# EAGLE board btle_board_R0_1 (EAGLE 6.6.0)
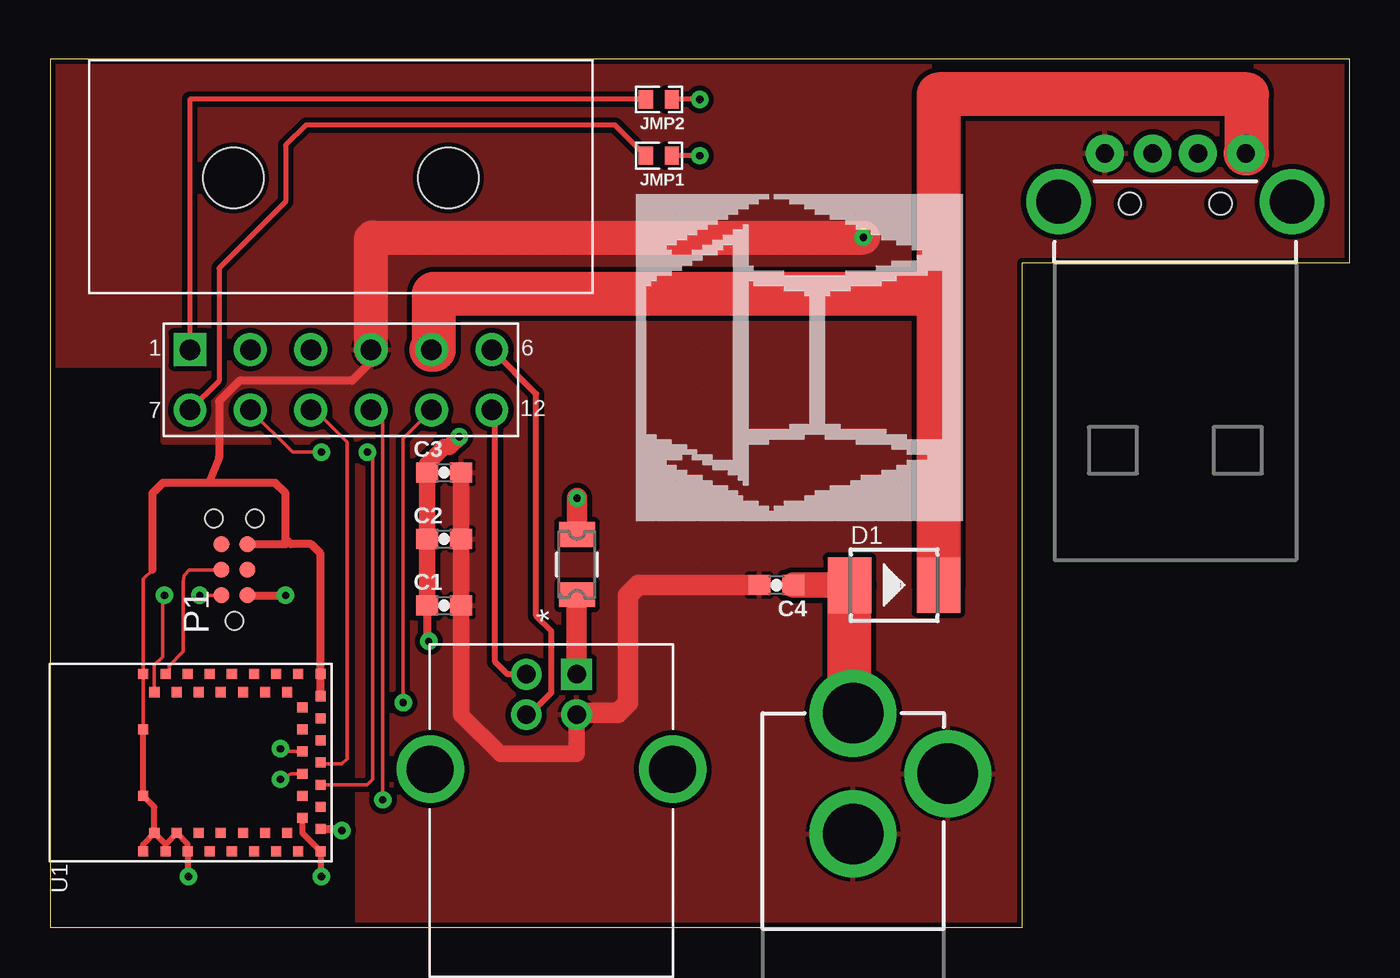
[diagram p0: board, top side]
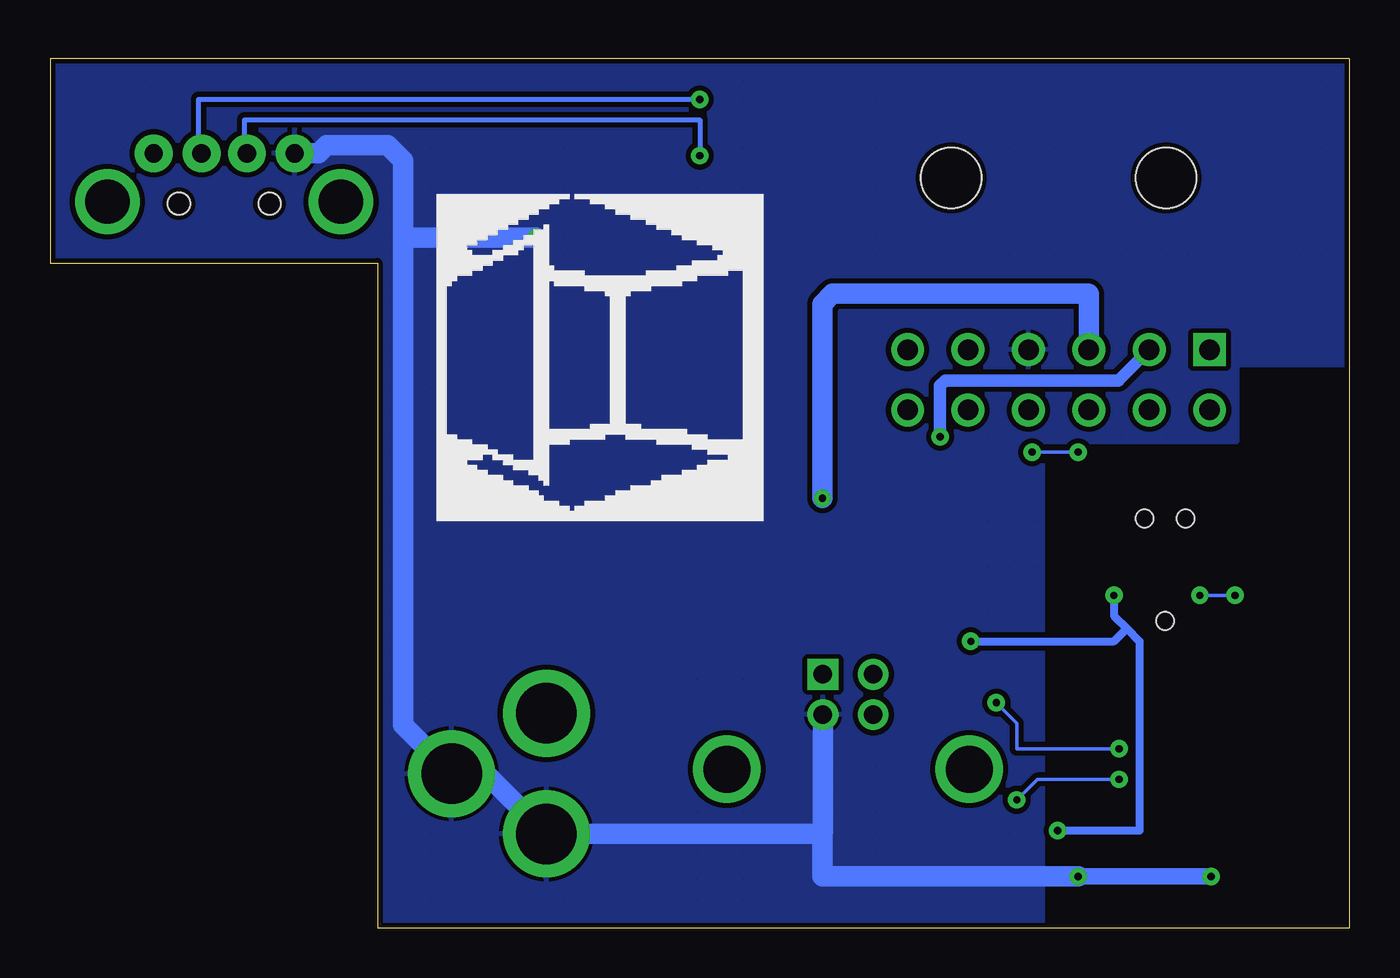
[diagram p1: board, bottom side, seen from below]

Size 64.52 x 43.18 mm. Coordinates in mm from the lower left corner, seen from the top.
Outline: 0,43.18 0,0 48.26,0 48.26,33.02 64.52,33.02 64.52,43.18 0,43.18
Copper layers (1*16): Top 0.035mm / dielectric 1.5mm / Bottom 0.035mm
Design rules "PatternAgents_7mil": minimum track width 7mil, minimum drill 14mil, track to track 7mil, track to pad 7mil, pad to pad 7mil, via to via 7mil, smd to smd 7mil, copper to edge 7mil, drill to drill 7mil, minimum pad ring 12mil, minimum via ring 10mil, stop-mask expansion 4mil, vias tented up to drill 25mil, thermal gap 7mil

## Footprints (pad centres in the part's own frame; a part is rotated, then mirrored left to right if it is on the bottom)
0603-CAP = smd 1.1 x 1: 1 -0.85,0; 2 0.85,0
DO-214AA = smd 2.159 x 2.743: + -2.21,0; - 2.21,0
1206LSERIES = smd 1.219 x 1.778: 1 -1.499,0; 2 1.499,0
JMP-2-NO-0402 = smd 0.7 x 0.9: 1 -0.65,0; 2 0.65,0
TC2030-MCP-NL = smd 0.787 x 0.787: 1 1.27,-0.635; 2 1.27,0.635; 3 2.54,-0.635; 4 2.54,0.635; 5 3.81,-0.635; 6 3.81,0.635 | hole 0.889: 0,0; 5.08,-1.016; 5.08,1.016
MOLEX_44428-1201 = drill 1.02 square: 1 7.5,5.065 | drill 1.02: 2 4.5,5.065; 3 1.5,5.065; 4 -1.5,5.065; 5 -4.5,5.065; 6 -7.5,5.065; 7 7.5,8.065; 8 4.5,8.065; 9 1.5,8.065; 10 -1.5,8.065; 11 -4.5,8.065; 12 -7.5,8.065 | hole 3: -5.34,-3.465; 5.34,-3.465
OST_USB-B1HSB6 = drill 0.92 square: 1 1.25,4.71 | drill 0.92: 2 -1.25,4.71; 3 -1.25,2.71; 4 1.25,2.71 | drill 2.33: P1 -6.02,0; P2 6.02,0
POWER_JACK_PTH = drill 2.997 pad 4.318: GND 0,7.7; GNDBREAK 4.7,10.7; PWR 0,13.7
USB-A-H = drill 0.914 pad 1.88: D+ 2.4,1.127; D- 2.4,-1.127; GND 2.4,3.5; VBUS 2.4,-3.5 | drill 2.2: GND2 0,-5.8; GND3 0,5.8 | hole 1.1: -0.1,2.25; -0.1,-2.25
BMD-300 = smd 0.5 x 0.5: P1 0.5,9.35; P2 1.4,8.8; P3 0.5,8.25; P4 1.4,7.7; P5 0.5,7.15; P6 1.4,6.6; P7 0.5,6.05; P8 1.4,5.5; P9 0.5,4.95; P10 1.4,4.4; P11 0.5,3.85; P12 1.4,3.3; P13 0.5,2.75; P14 1.4,2.2; P15 0.5,1.65; P16 0.5,0.55; P17 1.6,0.55; P18 2.15,1.45; P19 2.7,0.55; P20 3.25,1.45; P21 3.8,0.55; P22 4.35,1.45; P23 4.9,0.55; P24 5.45,1.45; P25 6,0.55; P26 6.55,1.45; P27 7.1,0.55; P28 7.65,1.45; P29 8.2,0.55; P30 9.3,0.55; P31 9.3,1.65; P32 8.4,2.2; P33 9.3,2.75; P34 8.4,3.3; P35 9.3,3.85; P36 8.4,4.4; P37 9.3,4.95; P38 8.4,5.5; P39 9.3,6.05; P40 8.4,6.6; P41 9.3,7.15; P42 8.4,7.7; P43 9.3,8.25; P44 8.4,8.8; P45 9.3,9.35; P46 6.55,9.35; P47 3.25,9.35

## Placement (x,y rotation side)
C1  0.1uF  [0603-CAP]  19.56,16 0 top
C2  10uF  [0603-CAP]  19.56,19.3 0 top
C3  10uF  [0603-CAP]  19.56,22.61 0 top
C4  10uF  [0603-CAP]  36.07,17.02 180 top
D1  28V-5A  [DO-214AA]  41.91,17.02 0 top
F1  1206L050YR  [1206LSERIES]  26.16,18.03 90 top
JMP1  [JMP-2-NO-0402]  30.23,38.35 180 top
JMP2  [JMP-2-NO-0402]  30.23,41.15 180 top
P1  [TC2030-MCP-NL]  9.14,15.24 90 top
P2  44428-1201  [MOLEX_44428-1201]  14.43,33.78 180 top
P3  USB-B1HSB6  [OST_USB-B1HSB6]  24.89,7.87 0 top
P4  POWER_JACKPTH  [POWER_JACK_PTH]  39.88,-3.05 0 top
P5  USB-A-H  [USB-A-H]  55.88,36.07 90 top
U1  [BMD-300]  13.97,3.3 90 top
U$4  [NSVR_LOGO]  45.21,20.32 0 bottom
U$100  [NSVR_LOGO]  29.21,20.32 0 top

## Library data of the parts
C1-C4 = PatternAgents-ProtoPads
D1 = Seeed-Diode-2016; MPN: SS54B
F1 = 1206L050; COPYRIGHT: Copyright C 2015 Accelerated Designs. All rights reserved; MANUFACTURER_PART_NUMBER: 1206L050YR; VENDOR: Littelfuse Inc
JMP1 JMP2 = PatternAgents-ProtoPads; BOM: EXCLUDE
P1 = tag-connect
P2 = 44428-1201; AVAILABILITY: Good; DESCRIPTION: Conn Wire to Board HDR 12 POS 3mm Solder RA Thru-Hole Micro-Fit 3.0 BMI? Tray; MF: Molex; MP: 44428-1201; PACKAGE: None; PRICE: 2.39 USD
P3 = USB-B1HSB6; AVAILABILITY: Warning; DESCRIPTION: Conn Usb Type b r/a Black; MF: On Shore Technology; MP: USB-B1HSB6; PACKAGE: None; PRICE: 0.42 USD
P4 = SparkFun-Connectors; PROD_ID: CONN-08197
P5 = SparkFun-Connectors; PROD_ID: CONN-08367
U1 = BMD-300
U$4 U$100 = nsvr

## Nets
3V3_EXT: C1.1 C2.1 C3.1 P1.1 P2.2 U1.P17
5V0: F1.2 P2.3
CTS_BMD: P2.9 U1.P23
GND: C1.2 C2.2 C3.2 C4.2 P1.5 P2.4 P3.4 P4.GND P4.GNDBREAK P5.GND U1.P1 U1.P2 U1.P3 U1.P4 U1.P5 U1.P16 U1.P18 U1.P29 U1.P30 U1.P45 U1.P46 U1.P47
I2C_SCL: JMP2.2 P2.1
I2C_SDA: JMP1.2 P2.7
RTS_BMD: P2.8 U1.P21
RXD_BMD: P2.11 U1.P24
SCL_BAT: JMP2.1 P5.D-
SDA_BAT: JMP1.1 P5.D+
SWCLK_BMD: P1.4 U1.P43
SWDIO_BMD: P1.2 U1.P44
TXD_BMD: P2.10 U1.P22
USB_DM: P2.12 P3.2
USB_DP: P2.6 P3.3
VBUS_IN: F1.1 P3.1
VIN: D1.- P2.5 P5.VBUS
VIN_DC: C4.1 D1.+ P4.PWR
VSS(GND): P1.3

## Tracks (layer width: path | path; a pad name or v marks a point on that pad's centre or on a via)
3V3_EXT  (via drill 0.36)
  Top 0.406: U1.P17 14.4,4.9 v14.48,4.83 | P1.1 v11.68,16.51 | C1.1 18.71,14.31 v18.8,14.22
  Top 0.813: v20.32,24.38 19.81,23.88 19.56,23.88 18.71,23.03 C3.1 C2.1 C1.1
  Bottom 0.406: v14.48,4.83 10.41,4.83 10.41,14.22 11.05,14.86 | 11.43,27.22 P2.2 | v11.68,16.51 11.68,15.49 11.05,14.86 | v18.8,14.22 11.68,14.22 11.05,14.86
  Bottom 0.61: v20.32,24.38 20.32,26.92 20.07,27.18 11.47,27.18 P2.2
5V0  (via drill 0.36)
  Top 1.016: v26.16,21.34 F1.2
  Bottom 1.016: P2.3 12.93,31.47 12.95,31.5 25.65,31.5 26.16,30.99 v26.16,21.34
CTS_BMD
  Top 0.178: P2.9 13.14,25.72 14.73,24.13 14.73,8.38 14.48,8.13 13.49,8.13 U1.P23
GND  (via drill 0.36)
  Top 0.178: U1.P46 U1.P45 4.62,17.32 5.08,17.78
  Top 0.305: U1.P46 U1.P47 5.17,6 U1.P2 | 5.72,4.15 U1.P2 | U1.P1 4.62,4.15 U1.P2 | U1.P3 5.72,4.15 | 5.72,4.15 U1.P4 6.82,4.15 U1.P5 6.82,2.58 v6.86,2.54 | v13.46,2.54 13.42,2.58 U1.P16 12.52,4.7 U1.P18
  Top 0.406: P1.5 11.68,19.05 11.68,19.3 | 11.68,19.3 11.68,21.59 11.18,22.1 7.87,22.1 | 7.87,22.1 5.59,22.1 5.08,21.59 5.08,17.78 | 15.93,28.12 14.99,27.18 9.4,27.18 8.38,26.16 8.38,23.37 7.87,22.1 | 11.68,19.3 11.94,19.05 12.95,19.05 13.42,18.58 U1.P30 U1.P29
  Top 0.813: P3.4 26.14,8.64 22.35,8.64 20.41,10.58 C1.2 C2.2 C3.2
  Top 1.016: C4.2 29.21,17.02 28.7,16.51 28.7,11.18 28.19,10.67 26.23,10.67 P3.4
  Top 1.676: P2.4 15.93,34.22 16,34.29 v40.39,34.29
  Bottom 0.813: v6.86,2.54 v13.46,2.54
  Bottom 1.016: P5.GND 51.19,38.47 50.8,38.86 47.75,38.86 46.99,38.1 46.99,34.29 | 46.99,34.29 46.99,10.06 P4.GNDBREAK 42.88,7.65 P4.GND 26.24,4.65 | 26.24,4.65 26.16,4.57 26.16,2.54 v13.46,2.54 | P3.4 26.14,4.75 26.24,4.65 | v40.39,34.29 46.99,34.29
  pour Top (isolate 0.254, hatched): 15.24,0 48.26,0 48.26,33.02 64.52,33.02 64.52,43.18 0,43.18 0,27.94 5.59,27.94 5.59,24.13 15.24,24.13
  pour Bottom (isolate 0.254, hatched): 15.24,0 48.26,0 48.26,33.02 64.52,33.02 64.52,43.18 0,43.18 0,27.94 5.59,27.94 5.59,24.13 15.24,24.13
I2C_SCL
  Top 0.254: JMP2.2 6.93,41.15 P2.1
I2C_SDA
  Top 0.254: P2.7 8.38,27.17 8.38,32.77 11.68,36.07 11.68,38.86 12.7,39.88 28.05,39.88 JMP1.2
RTS_BMD  (via drill 0.36)
  Top 0.178: U1.P21 15.74,7.1 16,7.37 16,23.37 v15.75,23.62 | v13.46,23.62 12.03,23.62 P2.8
  Bottom 0.178: v15.75,23.62 v13.46,23.62
RXD_BMD  (via drill 0.36)
  Top 0.178: U1.P24 11.57,8.75 v11.43,8.89 | v17.53,11.18 17.53,24.31 P2.11
  Bottom 0.178: v11.43,8.89 16.51,8.89 16.51,10.16 v17.53,11.18
SCL_BAT  (via drill 0.36)
  Top 0.254: v32.26,41.15 JMP2.1
  Bottom 0.254: P5.D- 57.15,38.47 57.15,41.15 v32.26,41.15
SDA_BAT  (via drill 0.36)
  Top 0.254: v32.26,38.35 JMP1.1
  Bottom 0.254: P5.D+ 54.86,38.47 54.86,40.13 32.26,40.13 v32.26,38.35
SWCLK_BMD
  Top 0.178: P1.4 6.91,17.78 6.66,17.5 6.6,17.2 6.6,13.72 5.89,13.01 5.89,12.78 U1.P43 5.84,12.72
SWDIO_BMD  (via drill 0.36)
  Top 0.178: 5.93,16.5 v5.66,16.51 5.59,16.18 5.59,13.46 5.17,13.04 U1.P44 | v7.42,16.51 P1.2
  Bottom 0.178: v5.66,16.51 v7.42,16.51
TXD_BMD  (via drill 0.36)
  Top 0.178: U1.P22 11.97,7.65 v11.43,7.37 | v16.51,6.35 16.51,25.14 P2.10
  Bottom 0.178: v11.43,7.37 15.49,7.37 v16.51,6.35
USB_DM
  Top 0.305: P3.2 22.72,12.58 22.1,13.21 22.1,25.55 P2.12
USB_DP
  Top 0.305: P3.3 23.79,10.58 24.89,11.68 24.89,14.73 24.13,15.49 24.13,26.52 P2.6
VBUS_IN
  Top 1.016: P3.1 26.14,16.52 F1.1
VIN
  Top 2.184: P5.VBUS 59.44,38.47 59.44,41.4 44.12,41.4 44.12,31.5 | 44.12,31.5 D1.- | P2.5 19.05,28.72 19.05,31.5 44.12,31.5
VIN_DC
  Top 1.27: C4.1 D1.+
  Top 2.184: P4.PWR 39.7,10.65 D1.+